# EAGLE board Sprinkler (EAGLE 9.6.2)
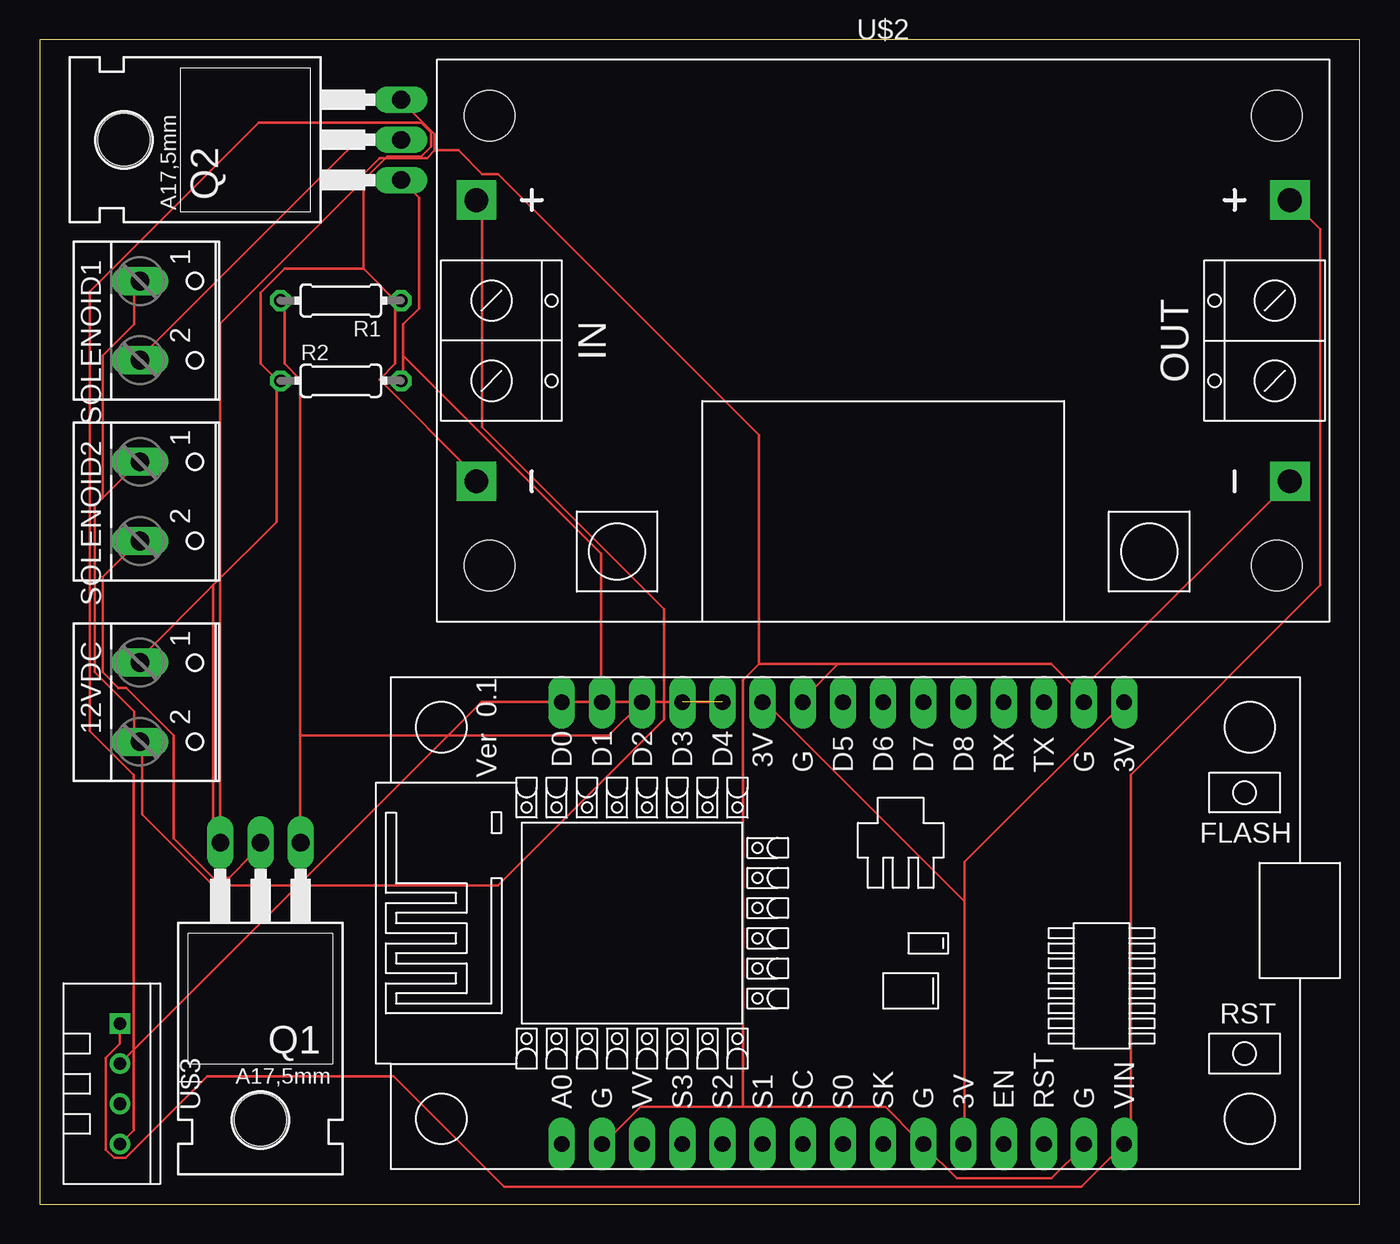
[diagram p0: board, top side]

Size 83.49 x 73.65 mm. Coordinates in mm from the lower left corner, seen from the top.
Outline: 0,0 83.49,0 83.49,73.65 0,73.65 0,0
Copper layers (1*16): Top 0.035mm / dielectric 1.5mm / Bottom 0.035mm
Design rules "default": minimum track width 6mil, minimum drill 0.35mm, track to track 6mil, track to pad 6mil, pad to pad 6mil, via to via 6mil, smd to smd 6mil, copper to edge 40mil, drill to drill 6mil, minimum pad ring 10mil, minimum via ring 8mil, stop-mask expansion 4mil, vias tented up to drill 0mil, thermal gap 10mil

## Footprints (pad centres in the part's own frame; a part is rotated, then mirrored left to right if it is on the bottom)
W237-102 = drill 1.194 long: 1 -2.5,-1.27; 2 2.5,-1.27
TO220AH = drill 1.118 long: B -2.54,-6.35; C 0,-6.35; E 2.54,-6.35 | hole 3.302: 0,11.176
0204/7 = drill 0.813 octagon: 1 -3.81,0; 2 3.81,0
NODEMCU = drill 1 pad 1.676 long: 1 -13.97,17.78; 2 -13.97,15.24; 3 -13.97,12.7; 4 -13.97,10.16; 5 -13.97,7.62; 6 -13.97,5.08; 7 -13.97,2.54; 8 -13.97,0; 9 -13.97,-2.54; 10 -13.97,-5.08; 11 -13.97,-7.62; 12 -13.97,-10.16; 13 -13.97,-12.7; 14 -13.97,-15.24; 15 -13.97,-17.78; 16 13.97,-17.78; 17 13.97,-15.24; 18 13.97,-12.7; 19 13.97,-10.16; 20 13.97,-7.62; 21 13.97,-5.08; 22 13.97,-2.54; 23 13.97,0; 24 13.97,2.54; 25 13.97,5.08; 26 13.97,7.62; 27 13.97,10.16; 28 13.97,12.7; 29 13.97,15.24; 30 13.97,17.78
DC-DC-LM2596-DISP = drill 1.5 pad 2.5 square: IN+ -25.718,8.89; IN- -25.718,-8.89; OUT+ 25.718,8.89; OUT- 25.718,-8.89 | hole 3.2: -24.892,14.224; 24.892,-14.224; 24.892,14.224; -24.892,-14.224
TEMP-HUM-SENSOR-DHT11 = drill 0.8 square: 1 -3.81,0 | drill 0.8: 2 -1.27,0; 3 1.27,0; 4 3.81,0

## Placement (x,y rotation side)
12VDC  [W237-102]  7.62,31.75 270 top
Q1  IRLB8748  [TO220AH]  13.97,16.51 180 top
Q2  IRLB8748  [TO220AH]  16.51,67.31 90 top
R1  10k Ohms  [0204/7]  19.05,57.15 180 top
R2  10k Ohms  [0204/7]  19.05,52.07 0 top
SOLENOID1  [W237-102]  7.62,55.88 270 top
SOLENOID2  [W237-102]  7.62,44.45 270 top
U$1  NODEMCU  [NODEMCU]  50.8,17.78 90 top
U$2  DC-DC-LM2596-DISP  [DC-DC-LM2596-DISP]  53.34,54.61 0 top
U$3  TEMP-HUM-SENSOR-DHT11  [TEMP-HUM-SENSOR-DHT11]  5.08,7.62 270 top

## Library data of the parts
12VDC SOLENOID1 SOLENOID2 = con-wago-500; MPN: 237-102; OC_FARNELL: unknown; OC_NEWARK: 70K9898
Q1 Q2 = transistor-power
R1 R2 = rcl; SPICEPREFIX: R
U$1 = nodemcu
U$2 U$3 = diy-modules

## Nets
3V: U$1.11 U$1.16 U$1.25
5VDC: U$1.15 U$2.OUT+ U$3.1
12VDC: 12VDC.2 SOLENOID1.1 SOLENOID2.1 U$2.IN+
GND: 12VDC.1 Q1.E Q2.E R1.1 R2.1 U$1.2 U$1.10 U$1.14 U$1.17 U$1.24 U$2.IN- U$2.OUT- U$3.4
S1_VOUT: Q2.C SOLENOID1.2
S2_VOUT: Q1.C SOLENOID2.2
SIG1: Q2.B R2.2 U$1.29
SIG2: Q1.B R1.2 U$1.28
SIG3: U$1.27 U$3.2

## Tracks (layer width: path | path; a pad name or v marks a point on that pad's centre or on a via)
3V
  Top 0.152: 58.49,19.15 58.49,21.65 68.49,31.65 U$1.16 | 58.49,19.15 58.49,4.15 U$1.11 | 58.49,19.15 45.99,31.65 U$1.25
5VDC
  Top 0.152: U$2.OUT+ 79.49,63.15 80.99,61.65 80.99,39.15 68.99,27.15 68.99,4.15 U$1.15 65.86,1.09 29.39,1.09 22.4,8.08 10.59,8.08 5.45,2.93 4.71,2.93 4.2,3.44 4.2,9.26 5.08,10.14 U$3.1
12VDC
  Top 0.152: 3.99,44.65 5.99,46.65 SOLENOID2.1 | 3.99,44.65 3.49,44.15 3.49,33.65 5.99,31.15 5.99,29.65 12VDC.2 6.49,29.15 6.49,24.65 10.99,20.15 28.99,20.15 39.49,30.65 39.49,37.65 27.99,49.15 27.99,63.15 U$2.IN+ | 3.99,44.65 3.99,53.65 5.99,55.65 5.99,58.15 SOLENOID1.1
GND
  Top 0.152: 22.49,57.15 22.49,53.15 21.49,52.15 27.49,46.15 U$2.IN- | 24.99,66.65 24.99,67.65 22.99,69.65 Q2.E | 24.99,66.65 24.49,66.15 21.49,66.15 20.49,65.15 20.49,59.15 | 22.49,57.15 20.49,59.15 | 22.49,57.15 R1.1 | 10.99,39.15 6.49,34.65 12VDC.1 | 10.99,39.15 14.99,43.15 14.99,51.65 R2.1 14.99,52.15 13.99,53.15 13.99,57.65 15.49,59.15 20.49,59.15 | 10.99,39.15 10.99,23.15 Q1.E 11.43,55.69 21.99,66.24 24.14,66.24 24.76,66.87 24.76,67.75 24.14,68.38 13.86,68.38 3.18,57.7 3.18,29.93 5.96,27.15 5.96,4.69 U$3.4 | 44.49,6.15 53.49,6.15 55.49,4.15 U$1.10 55.99,3.65 57.99,1.65 63.99,1.65 65.99,3.65 U$1.14 | 44.49,6.15 37.99,6.15 35.99,4.15 U$1.2 | 50.49,34.15 48.49,32.15 U$1.24 | 50.49,34.15 63.99,34.15 65.99,32.15 U$1.17 66.49,32.15 66.49,33.15 78.99,45.65 U$2.OUT- | 44.49,6.15 44.49,33.15 45.49,34.15 | 50.49,34.15 45.49,34.15 | 24.99,66.65 26.49,66.65 27.99,65.15 28.99,65.15 45.49,48.65 45.49,34.15
S1_VOUT
  Top 0.152: Q2.C 22.49,67.15 19.99,67.15 6.49,53.65 SOLENOID1.2
S2_VOUT
  Top 0.152: Q1.C 13.49,22.65 13.49,22.15 11.99,20.65 10.99,20.65 8.49,23.15 8.49,29.65 5.49,32.65 4.99,32.65 3.99,33.65 3.99,39.65 5.99,41.65 SOLENOID2.2
SIG1
  Top 0.152: 22.99,53.65 22.99,55.65 23.99,56.65 23.99,63.65 22.99,64.65 Q2.B | 22.99,53.65 22.99,52.15 R2.2 | 22.99,53.65 35.49,41.15 35.49,32.15 U$1.29
SIG2
  Top 0.152: 16.49,29.65 16.49,23.15 Q1.B | 16.49,29.65 16.49,52.15 15.49,53.15 15.49,57.15 R1.2 | 16.49,29.65 35.99,29.65 37.99,31.65 U$1.28
SIG3  (1 unrouted)
  Top 0.152: U$3.2 27.94,31.75 43.18,31.75